# EAGLE board dmpcb (EAGLE 9.4.2)
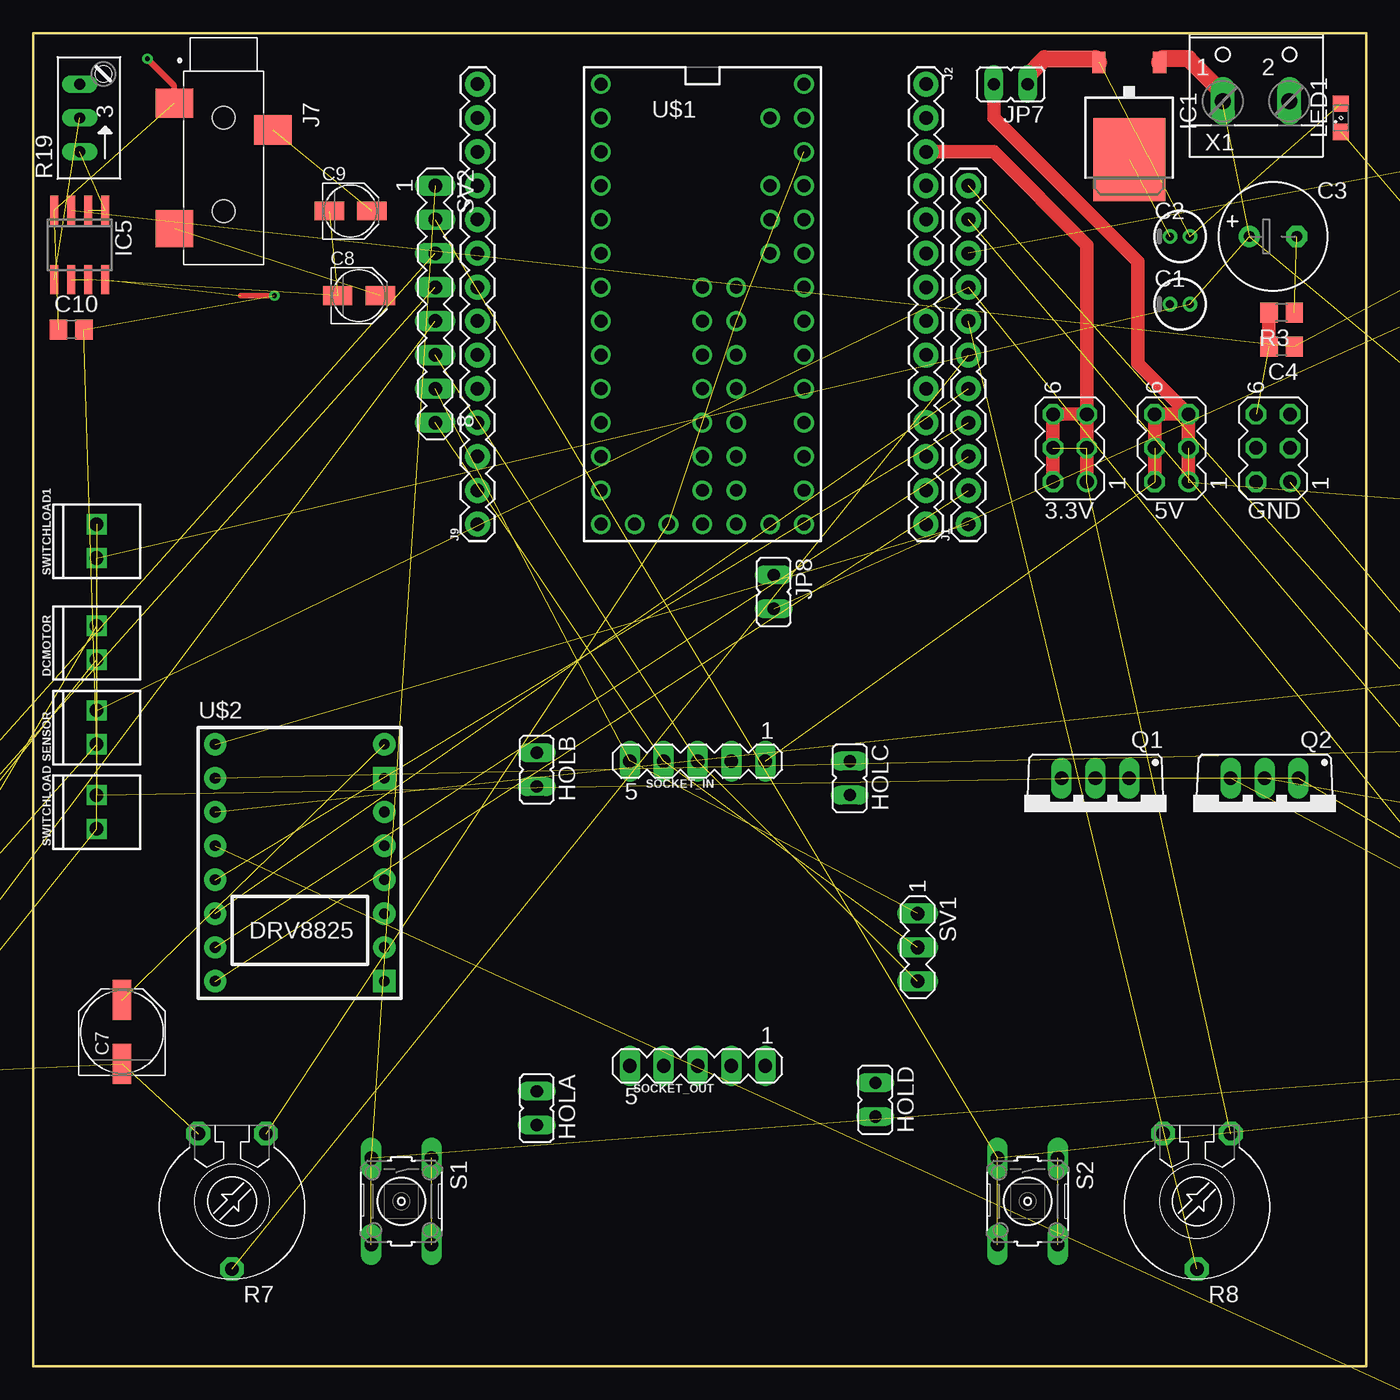
[diagram p0: board, top side]
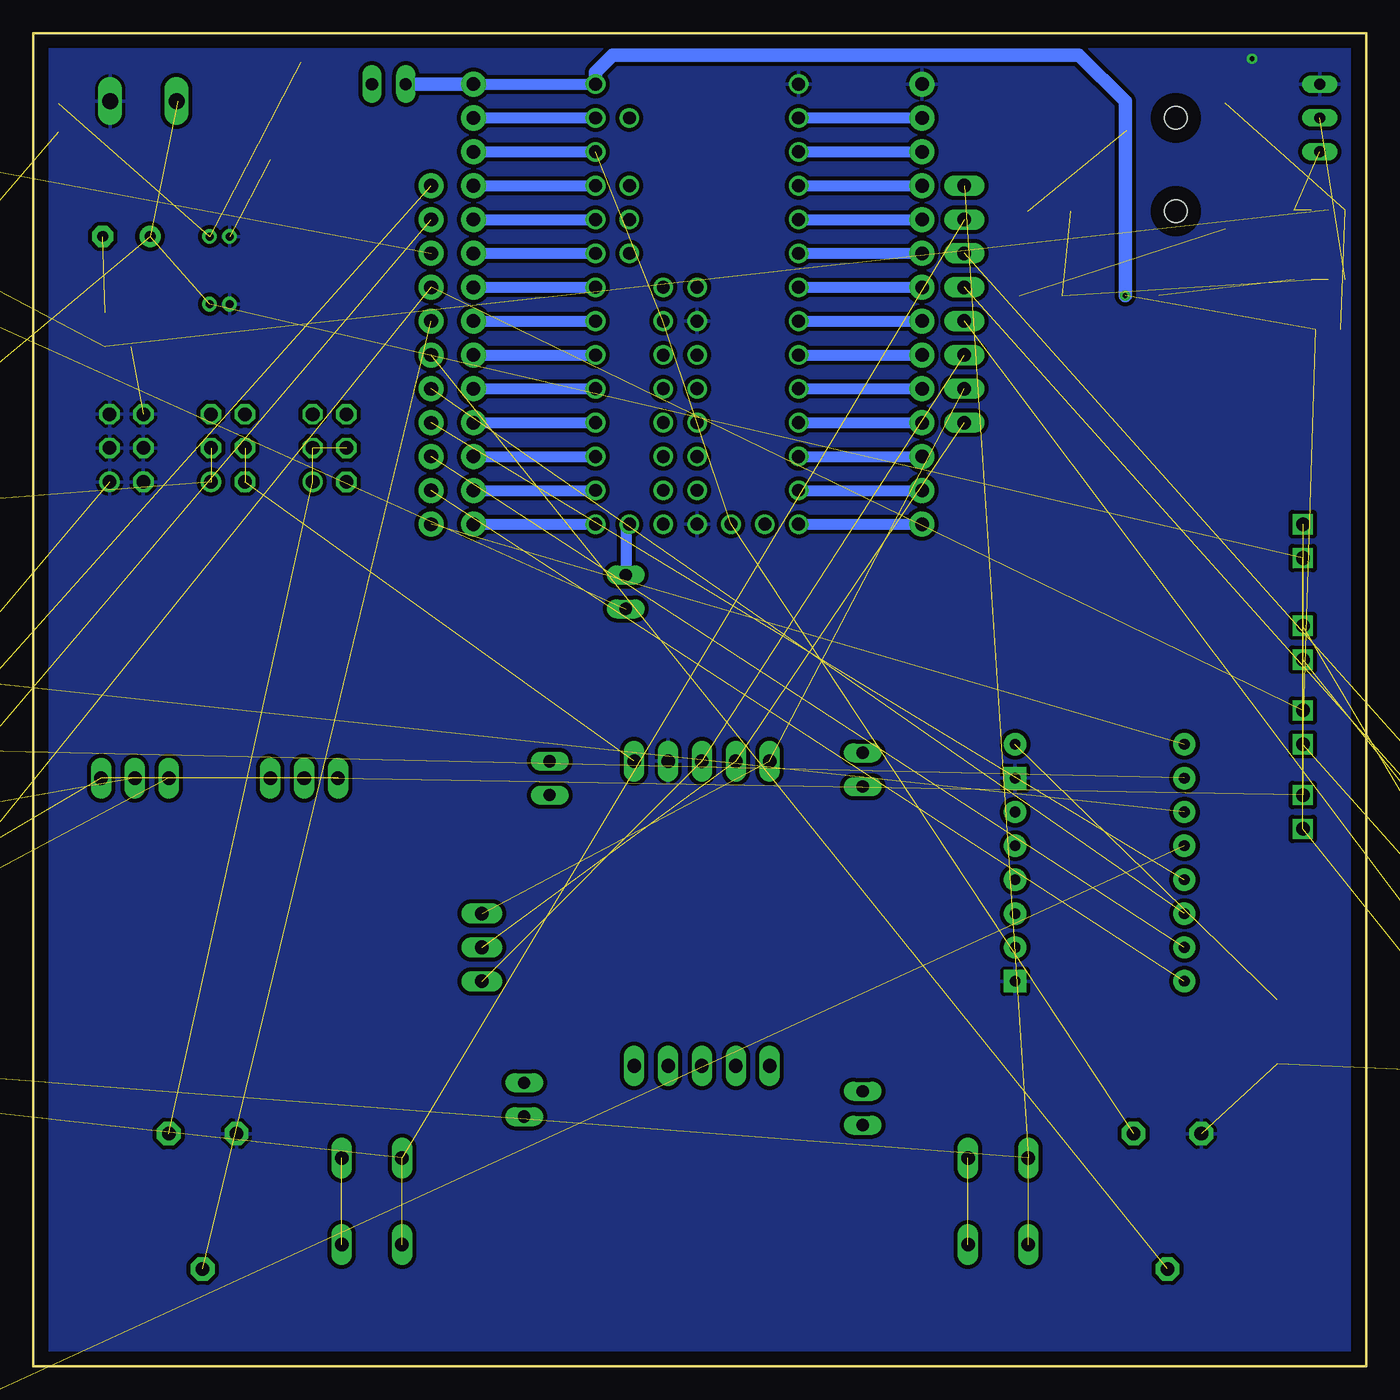
[diagram p1: board, bottom side, seen from below]

Size 100 x 100 mm. Coordinates in mm from the lower left corner, seen from the top.
Outline: 100,100 100,0 0,0 0,100 100,100
Copper layers (1*16): Top 0.035mm / dielectric 1.5mm / Bottom 0.035mm
Design rules "default": minimum track width 6mil, minimum drill 0.35mm, track to track 6mil, track to pad 6mil, pad to pad 6mil, via to via 6mil, smd to smd 6mil, copper to edge 40mil, drill to drill 6mil, minimum pad ring 10mil, minimum via ring 8mil, stop-mask expansion 4mil, vias tented up to drill 0mil, thermal gap 10mil

## Footprints (pad centres in the part's own frame; a part is rotated, then mirrored left to right if it is on the bottom)
MA03-2 = drill 1.016: 1 -2.54,-1.27 | drill 1.016 octagon: 2 -2.54,1.27; 3 0,-1.27; 4 0,1.27; 5 2.54,-1.27; 6 2.54,1.27
SANYO-OSCON_A' = drill 0.6 pad 1: + 0.75,0; - -0.75,0
E3,5-8 = drill 0.813 pad 1.6: + -1.778,0 | drill 0.813 pad 1.6 octagon: - 1.778,0
C0805 = smd 1.3 x 1.5: 1 -0.95,0; 2 0.95,0
PANASONIC_D = smd 3 x 1.4: + 2.4,0; - -2.4,0
PANASONIC_B = smd 2.2 x 1.4: + 1.6,0; - -1.6,0
LL-34 = smd 1.524 x 1.676: A -1.524,0; C 1.524,0
1X02_2.54_SCREWTERM = drill 1.016 square: P1 2.54,0; P2 0,0
JP1 = drill 0.914 long: 1 0,-1.27; 2 0,1.27
TO252 = smd 1 x 1.6: 1 -2.28,-4.8; 2 2.28,-4.8 | smd 5.4 x 6.2: 3 0,2.5
DIL16 = drill 0.813 long: 1 -8.89,-3.81; 2 -6.35,-3.81; 3 -3.81,-3.81; 4 -1.27,-3.81; 5 1.27,-3.81; 6 3.81,-3.81; 7 6.35,-3.81; 8 8.89,-3.81; 9 8.89,3.81; 10 6.35,3.81; 11 3.81,3.81; 12 1.27,3.81; 13 -1.27,3.81; 14 -3.81,3.81; 15 -6.35,3.81; 16 -8.89,3.81
SO08 = smd 0.6 x 2.2: 1 -1.905,-2.6; 2 -0.635,-2.6; 3 0.635,-2.6; 4 1.905,-2.6; 5 1.905,2.6; 6 0.635,2.6; 7 -0.635,2.6; 8 -1.905,2.6
1X11 = drill 1.016 pad 1.88: 1 0,0; 2 2.54,0; 3 5.08,0; 4 7.62,0; 5 10.16,0; 6 12.7,0; 7 15.24,0; 8 17.78,0; 9 20.32,0; 10 22.86,0; 11 25.4,0
1X14 = drill 1.016 pad 1.88: 1 0,0; 2 2.54,0; 3 5.08,0; 4 7.62,0; 5 10.16,0; 6 12.7,0; 7 15.24,0; 8 17.78,0; 9 20.32,0; 10 22.86,0; 11 25.4,0; 12 27.94,0; 13 30.48,0; 14 33.02,0
CUI_SJ-3523-SMT-TR = smd 2.2 x 2.8: 1 -1.1,-3.7; 3 0.9,3.7 | smd 2.8 x 2.8: 2 8.3,-3.7 | hole 1.7: 0,0; 7,0
1X03_LOCK_LONGPADS = drill 1.016 long: 1 0,0; 2 2.54,-0.254; 3 5.08,0
JP2 = drill 0.914 long: 1 -2.54,0; 2 0,0; 3 2.54,0
JP3Q = drill 0.914 octagon: 1 -2.54,-1.27; 2 -2.54,1.27; 3 0,-1.27; 4 0,1.27; 5 2.54,-1.27; 6 2.54,1.27
SML0805 = smd 1.2 x 1.2: A 1.05,0; C -1.05,0
TO220BV = drill 1.016 long: D 0,-2.54; G -2.54,-2.54; S 2.54,-2.54
R0805 = smd 1.3 x 1.5: 1 -0.95,0; 2 0.95,0
PT-10 = drill 1.016 pad 1.778 octagon: 1 -2.54,-5.08; 2 2.54,-5.08; 3 0,5.08
M0805 = smd 1.3 x 1.6: 1 -0.95,0; 2 0.95,0
RJ9W = drill 0.813 long: A 2.54,0.635; E -2.54,0.635; S 0,0.635
B3F-10XX = drill 1.016 long: 1 -3.251,2.261; 2 3.251,2.261; 3 -3.251,-2.261; 4 3.251,-2.261
MA05-1 = drill 1.016 long: 1 -5.08,0; 2 -2.54,0; 3 0,0; 4 2.54,0; 5 5.08,0
MA03-1 = drill 1.016 long: 1 -2.54,0; 2 0,0; 3 2.54,0
MA08-1 = drill 1.016 long: 1 -8.89,0; 2 -6.35,0; 3 -3.81,0; 4 -1.27,0; 5 1.27,0; 6 3.81,0; 7 6.35,0; 8 8.89,0
TEENSY_3.0-3.2_ALL_PINS_&_PADS = drill 0.965: 0 -7.62,13.97; 1 -7.62,11.43; 2 -7.62,8.89; 3 -7.62,6.35; 3.3V 7.62,11.43; 3.3V1 -2.54,-16.51; 3.3V2 2.54,-1.27; 4 -7.62,3.81; 5 -7.62,1.27; 6 -7.62,-1.27; 7 -7.62,-3.81; 8 -7.62,-6.35; 9 -7.62,-8.89; 10 -7.62,-11.43; 11 -7.62,-13.97; 12 -7.62,-16.51; 13 7.62,-16.51; 14/A0 7.62,-13.97; 15/A1 7.62,-11.43; 16/A2 7.62,-8.89; 17/A3 7.62,-6.35; 18/A4 7.62,-3.81; 19/A5 7.62,-1.27; 20/A6 7.62,1.27; 21/A7 7.62,3.81; 22/A8 7.62,6.35; 23/A9 7.62,8.89; 24 0,-3.81; 25 0,-6.35; 26 0,-8.89; 27 0,-11.43; 28 0,-13.97; 29 2.54,-13.97; 30 2.54,-11.43; 31 2.54,-8.89; 32 2.54,-6.35; 33 2.54,-3.81; A10 5.08,6.35; A11 5.08,3.81; A12 0,1.27; A13 2.54,1.27; AGND 7.62,13.97; AREF 5.08,8.89; GND -7.62,16.51; GND1 0,-16.51; GND2 0,-1.27; PGM 2.54,-16.51; RESET/DAC 5.08,-16.51; VBAT -5.08,-16.51; VIN 7.62,16.51; VUSB 5.08,13.97
POLOLU-DRV8825 = drill 0.8 pad 1.676: A1 6.35,-1.27; A2 6.35,-3.81; B1 6.35,1.27; B2 6.35,3.81; DIR -6.35,-8.89; EN_N -6.35,8.89; FLT_N 6.35,-6.35; M0 -6.35,6.35; M1 -6.35,3.81; M2 -6.35,1.27; RST_N -6.35,-1.27; SLP_N -6.35,-3.81; STEP_N -6.35,-6.35; VMOT 6.35,8.89 | drill 0.8 pad 1.676 square: GND 6.35,-8.89; GND2 6.35,6.35
W237-102 = drill 1.194 long: 1 -2.5,-1.27; 2 2.5,-1.27

## Placement (x,y rotation side)
3.3V  [MA03-2]  77.78,68.89 90 top
5V  [MA03-2]  85.39,68.89 90 top
C1  0.33uF  [SANYO-OSCON_A']  86.03,79.68 0 top
C2  0.1uF  [SANYO-OSCON_A']  86.03,84.76 0 top
C3  1000uf  [E3,5-8]  93.02,84.76 0 top
C4  100nf  [C0805]  93.65,76.5 180 top
C7  100uf  [PANASONIC_D]  6.66,25.07 90 top
C8  100uf  [PANASONIC_B]  24.44,80.31 0 top
C9  100uf  [PANASONIC_B]  23.8,86.67 0 top
C10  100nf  [C0805]  2.84,77.78 0 top
D1  1N4148  [LL-34]  150.8,19.99 180 top  (outside the outline)
D2  1N4148  [LL-34]  157.15,19.99 180 top  (outside the outline)
DCMOTOR  [1X02_2.54_SCREWTERM]  4.75,53.01 90 top
GND  [MA03-2]  93.02,68.89 90 top
HOLA  [JP1]  37.77,19.36 180 top
HOLB  [JP1]  37.77,44.76 180 top
HOLC  [JP1]  61.27,44.12 180 top
HOLD  [JP1]  63.17,19.99 180 top
IC1  7805DT  [TO252]  82.22,93.02 180 top
IC2  L293D  [DIL16]  -14.3,20.62 270 top  (outside the outline)
IC4  LM358D  [SO08]  263.83,47.93 180 top  (outside the outline)
IC5  LM358D  [SO08]  3.48,84.12 180 top
J1  [1X11]  70.16,63.17 90 top
J2  [1X14]  66.98,96.19 270 top
J7  SJ-3523-SMT-TR  [CUI_SJ-3523-SMT-TR]  14.28,93.65 270 top
J8  [1X03_LOCK_LONGPADS]  152.07,116.51 180 top  (outside the outline)
J9  [1X14]  33.33,63.17 90 top
JP1  [JP2]  149.53,33.96 180 top  (outside the outline)
JP2  [JP2]  158.42,33.96 180 top  (outside the outline)
JP3  [JP3Q]  117.78,42.85 180 top  (outside the outline)
JP4  [JP2]  152.07,-24.46 90 top  (outside the outline)
JP5  [JP2]  178.74,59.36 180 top  (outside the outline)
JP6  [JP2]  182.55,47.93 180 top  (outside the outline)
JP7  [JP1]  73.33,96.19 90 top
JP8  [JP1]  55.55,58.09 180 top
LED1  [SML0805]  98.09,93.65 90 top
Q1  IRF530  [TO220BV]  79.68,41.58 180 top
Q2  IRF530  [TO220BV]  92.38,41.58 180 top
R1  100k  [R0805]  124.13,26.34 180 top  (outside the outline)
R2  1k  [R0805]  125.4,19.99 180 top  (outside the outline)
R3  100k  [R0805]  93.65,79.05 180 top
R4  220  [R0805]  155.88,26.34 180 top  (outside the outline)
R5  100k  [R0805]  136.83,26.34 180 top  (outside the outline)
R6  1k  [R0805]  130.48,19.99 180 top  (outside the outline)
R7  b10k  [PT-10]  14.91,12.37 180 top
R8  b10k  [PT-10]  87.3,12.37 180 top
R9  1M  [M0805]  135.56,19.99 180 top  (outside the outline)
R10  10M  [M0805]  160.96,26.34 180 top  (outside the outline)
R11  10K  [M0805]  120.32,19.99 180 top  (outside the outline)
R12  10k  [M0805]  166.04,26.34 180 top  (outside the outline)
R13  10k  [M0805]  171.12,26.34 180 top  (outside the outline)
R15  b100k  [RJ9W]  181.28,105.08 180 top  (outside the outline)
R16  10K  [M0805]  159.69,64.44 180 top  (outside the outline)
R17  b10k  [RJ9W]  181.28,115.24 180 top  (outside the outline)
R18  270R  [M0805]  183.82,124.13 180 top  (outside the outline)
R19  b10k  [RJ9W]  4.12,93.65 90 top
S1  [B3F-10XX]  27.61,12.37 270 top
S2  [B3F-10XX]  74.6,12.37 270 top
SENSOR  [1X02_2.54_SCREWTERM]  4.75,46.66 90 top
SOCKET_IN  [MA05-1]  49.84,45.39 180 top
SOCKET_OUT  [MA05-1]  49.84,22.53 180 top
SV1  [MA03-1]  66.34,31.42 270 top
SV2  [MA08-1]  30.15,79.68 270 top
SWITCHLOAD  [1X02_2.54_SCREWTERM]  4.75,40.31 90 top
SWITCHLOAD1  [1X02_2.54_SCREWTERM]  4.75,60.63 90 top
U$1  TEENSY_3.1-3.2_ALL_PINS&PADS  [TEENSY_3.0-3.2_ALL_PINS_&_PADS]  50.2,79.68 0 top
U$2  POLOLU-DRV8825  [POLOLU-DRV8825]  19.99,37.77 0 top
X1  [W237-102]  91.75,96.19 0 top

## Library data of the parts
3.3V 5V GND SOCKET_IN SOCKET_OUT SV1 SV2 = con-lstb; OC_FARNELL: unknown; OC_NEWARK: unknown
C1-C4 C7-C10 = rcl; SPICEPREFIX: C
D1 D2 = Seeed-Diode; MPN: 1N4148
DCMOTOR J1 J2 J8 J9 SENSOR SWITCHLOAD SWITCHLOAD1 = SparkFun-Connectors
HOLA HOLB HOLC HOLD JP1-JP8 = jumper
IC1 IC4 IC5 = linear
IC2 = st-microelectronics; MPN: L293D; OC_FARNELL: 9589619; OC_NEWARK: 56P8249
J7 = SJ-3523-SMT-TR; MF: CUI Inc; STANDARD: Manufacturer recommendations
LED1 = led
Q1 Q2 = transistor-power
R1 R2 R5 R6 = resistor
R3 R4 R9-R13 R16 R18 = rcl; SPICEPREFIX: R
R7 R8 = rcl; SPICEMODEL: POT; SPICEPREFIX: X
R15 R17 R19 = pot
S1 S2 = switch-omron; MPN: B3F-1000; OC_FARNELL: 176432; OC_NEWARK: 36M3542
U$1 = Teensy_3_and_LC_Series_Boards_v1.4
U$2 = alvarop-lib
X1 = con-wago-500; MPN: 237-102; OC_FARNELL: unknown; OC_NEWARK: 70K9898

## Nets
3.3V: 3.3V.1 3.3V.2 3.3V.3 3.3V.4 3.3V.5 3.3V.6 J2.3 R7.1 R8.1 U$1.3.3V U$1.3.3V1 U$1.3.3V2
+5V: 5V.1 5V.2 5V.3 5V.4 5V.5 5V.6 C10.2 IC2.16 IC4.8 IC5.8 J2.1 JP4.3 JP5.3 JP6.3 JP7.2 SENSOR.P2 SOCKET_IN.1 U$1.VIN
A1: U$2.A1
A2: U$2.A2
AGND: J2.2 U$1.AGND
AREF: U$1.AREF
B1: U$2.B1
B2: U$2.B2
BETTERAUDIOOUT: JP8.2 R17.E
BUTTON01: R12.2 S1.3 S1.4 SV2.1
BUTTON02: R13.2 S2.3 S2.4 SV2.2
D: JP1.2 JP2.2 Q1.D Q2.D SWITCHLOAD1.P1 SWITCHLOAD.P1
DNC: U$2.FLT_N
DRV8825DIR: J1.2 U$2.DIR
DRV8825EN: J1.1 U$2.EN_N
DRV8825RST: J1.4 U$2.RST_N
DRV8825SLP: J1.5 U$2.SLP_N
DRV8825STEP: J1.3 U$2.STEP_N
G: Q1.G Q2.G R1.1 R2.2 R5.1 R6.2
GND: C1.- C2.- C4.2 C7.- C10.1 GND.1 GND.2 GND.3 GND.4 GND.5 GND.6 IC1.3 IC2.4 IC2.5 IC2.12 IC2.13 IC4.4 IC5.4 J7.1 J9.14 JP3.2 JP3.4 JP3.6 JP4.1 JP5.1 JP6.1 R3.2 R4.1 R7.2 R8.2 R12.1 R13.1 R16.2 R19.A SOCKET_IN.2 U$1.GND U$1.GND1 U$1.GND2 U$2.GND U$2.GND2 X1.2
LM293EN: IC2.1 SV2.3
LM293IN01: IC2.2 SV2.4
LM293IN02: IC2.7 SV2.5
MAX7219CLK: SOCKET_IN.5 SV1.1 SV2.7
MAX7219CS: SOCKET_IN.4 SV1.2 SV2.8
MAX7219DIN: SOCKET_IN.3 SV1.3 SV2.6
MOSFET01: J1.10 R2.1
MOSFET02: J1.11 R6.1
N$5: DCMOTOR.P2 IC2.3
N$6: DCMOTOR.P1 IC2.6
N$8: C3.- R3.1
N$9: LED1.C R4.2
N$11: D2.A JP2.3
N$12: D1.A JP1.3
N$16: JP3.5 R10.1
N$17: JP3.3 R9.1
N$18: JP3.1 R11.1
N$19: S1.1 S1.2
N$20: IC4.5 J8.3
N$21: S2.1 S2.2
N$22: U$1.24
N$23: J2.4 U$1.23/A9
N$25: C2.+ IC1.2 JP7.1 LED1.A
N$26: J2.5 U$1.22/A8
N$27: J2.6 U$1.21/A7
N$28: J2.7 U$1.20/A6
N$29: J2.8 U$1.19/A5
N$30: J2.9 U$1.18/A4
N$31: J2.10 U$1.17/A3
N$32: J2.11 U$1.16/A2
N$33: J2.12 U$1.15/A1
N$34: J2.13 U$1.14/A0
N$35: J2.14 U$1.13
N$36: J9.1 U$1.12
N$37: J9.2 U$1.11
N$38: J9.3 U$1.10
N$39: J9.4 U$1.9
N$40: J9.5 U$1.8
N$41: J9.6 U$1.7
N$42: U$1.25
N$43: U$1.26
N$44: U$1.27
N$45: U$1.28
N$46: U$1.29
N$47: U$1.30
N$48: U$1.31
N$49: U$1.32
N$50: U$1.33
N$51: U$1.A10
N$52: U$1.A11
N$53: U$1.A12
N$54: U$1.A13
N$55: JP8.1 U$1.RESET/DAC
N$57: JP4.2 U$2.M2
N$58: JP5.2 U$2.M1
N$59: JP6.2 U$2.M0
N$61: J9.12 U$1.1
N$62: J9.13 U$1.0
N$63: IC4.2 R15.A R16.1
N$66: C8.+ J7.2
N$67: R17.A R17.S R18.2
N$68: C4.1 IC5.3 R18.1
N$69: IC5.1 IC5.2 R19.E
N$70: IC4.6 J8.2
N$71: IC5.5 R19.S
N$72: C8.- C9.- IC5.6 IC5.7
N$73: C9.+ J7.3
N$75: IC4.7 J8.1
OPAMPIN: IC4.3
OPAMPOUT: IC4.1 J1.9 R15.E R15.S
PIN2: J9.11 U$1.2
PIN3: J9.10 U$1.3
PIN4: J9.9 U$1.4
PIN5: J9.8 U$1.5
PIN6: J9.7 U$1.6
POT01: J1.6 R7.3
POT02: J1.7 R8.3
S: Q1.S Q2.S R1.2 R5.2
SENSORPORT: J1.8 R9.2 R10.2 R11.2 SENSOR.P1
V+: C1.+ C3.+ D1.C D2.C IC1.1 IC2.8 JP1.1 JP2.1 SWITCHLOAD1.P2 SWITCHLOAD.P2 X1.1
VBAT: U$1.VBAT
VMOT: C7.+ U$2.VMOT
VUSB: U$1.VUSB

## Tracks (layer width: path | path; a pad name or v marks a point on that pad's centre or on a via)
3.3V  (6 unrouted)
  Top 1.016: J2.3 72.06,91.11 79.05,84.12 3.3V.5 | 3.3V.5 3.3V.1 | 3.3V.2 3.3V.6 3.3V.5
  Bottom 0.813: J2.3 U$1.3.3V
+5V  (via drill 0.35)  (11 unrouted)
  Top 0.406: v18.09,80.31 15.54,80.31
  Top 1.016: 5V.5 82.86,75.23 82.86,82.86 72.06,93.65 JP7.2 | 5V.5 5V.1 | 5V.2 5V.6 5V.5
  Bottom 0.813: J2.1 U$1.VIN
  Bottom 1.016: J2.1 JP7.2 | U$1.VIN 57.82,97.09 56.54,98.37 21.54,98.37 18.09,94.92 v18.09,80.31
AGND
  Bottom 0.813: J2.2 U$1.AGND
BETTERAUDIOOUT  (1 unrouted)
BUTTON01  (3 unrouted)
BUTTON02  (3 unrouted)
D  (5 unrouted)
DRV8825DIR  (1 unrouted)
DRV8825EN  (1 unrouted)
DRV8825RST  (1 unrouted)
DRV8825SLP  (1 unrouted)
DRV8825STEP  (1 unrouted)
G  (5 unrouted)
GND  (via drill 0.35)  (19 unrouted)
  Top 0.406: J7.1 10.57,96.08 v8.56,98.09
  Top 1.016: R3.2 C4.2
  pour Bottom (isolate 0.305): 112.7,-11.76 -14.3,-11.76 -14.3,112.7 112.7,112.7
LM293EN  (1 unrouted)
LM293IN01  (1 unrouted)
LM293IN02  (1 unrouted)
MAX7219CLK  (2 unrouted)
MAX7219CS  (2 unrouted)
MAX7219DIN  (2 unrouted)
MOSFET01  (1 unrouted)
MOSFET02  (1 unrouted)
N$5  (1 unrouted)
N$6  (1 unrouted)
N$8  (1 unrouted)
N$9  (1 unrouted)
N$11  (1 unrouted)
N$12  (1 unrouted)
N$16  (1 unrouted)
N$17  (1 unrouted)
N$18  (1 unrouted)
N$19  (1 unrouted)
N$20  (1 unrouted)
N$21  (1 unrouted)
N$23
  Bottom 0.813: J2.4 U$1.23/A9
N$25  (2 unrouted)
  Top 1.27: JP7.1 74.6,96.83 75.87,98.09 79.66,98.09 IC1.2
N$26
  Bottom 0.813: J2.5 U$1.22/A8
N$27
  Bottom 0.813: J2.6 U$1.21/A7
N$28
  Bottom 0.813: J2.7 U$1.20/A6
N$29
  Bottom 0.813: J2.8 U$1.19/A5
N$30
  Bottom 0.813: J2.9 U$1.18/A4
N$31
  Bottom 0.813: J2.10 U$1.17/A3
N$32
  Bottom 0.813: J2.11 U$1.16/A2
N$33
  Bottom 0.813: J2.12 U$1.15/A1
N$34
  Bottom 0.813: J2.13 U$1.14/A0
N$35
  Bottom 0.813: J2.14 U$1.13
N$36
  Bottom 0.813: U$1.12 J9.1
N$37
  Bottom 0.813: U$1.11 J9.2
N$38
  Bottom 0.813: U$1.10 J9.3
N$39
  Bottom 0.813: U$1.9 J9.4
N$40
  Bottom 0.813: U$1.8 J9.5
N$41
  Bottom 0.813: U$1.7 J9.6
N$55
  Bottom 0.813: U$1.RESET/DAC 55.55,62.9 JP8.1
N$57  (1 unrouted)
N$58  (1 unrouted)
N$59  (1 unrouted)
N$61
  Bottom 0.813: U$1.1 J9.12
N$62
  Bottom 0.813: U$1.0 J9.13
N$63  (2 unrouted)
N$66  (1 unrouted)
N$67  (2 unrouted)
N$68  (2 unrouted)
N$69  (2 unrouted)
N$70  (1 unrouted)
N$71  (1 unrouted)
N$72  (3 unrouted)
N$73  (1 unrouted)
N$75  (1 unrouted)
OPAMPOUT  (3 unrouted)
PIN2
  Bottom 0.813: U$1.2 J9.11
PIN3
  Bottom 0.813: U$1.3 J9.10
PIN4
  Bottom 0.813: U$1.4 J9.9
PIN5
  Bottom 0.813: U$1.5 J9.8
PIN6
  Bottom 0.813: U$1.6 J9.7
POT01  (1 unrouted)
POT02  (1 unrouted)
S  (3 unrouted)
SENSORPORT  (4 unrouted)
V+  (via drill 0.35)  (9 unrouted)
  Top 1.27: X1.1 89.17,94.92 v89.17,94.96 89.17,95.59 86.67,98.09 84.78,98.09 IC1.1
VMOT  (1 unrouted)